# Altium PCB Copy of PCB1-DESKTOP-Q.PcbDoc
Units mil, origin at the board's own origin, x right, y up, seen from the top; angles counter-clockwise.
Board outline 6245 x 2920 mil, 2 copper layers (Top Layer, Bottom Layer); 32 components, 27 nets, 175 pads, 2 vias.
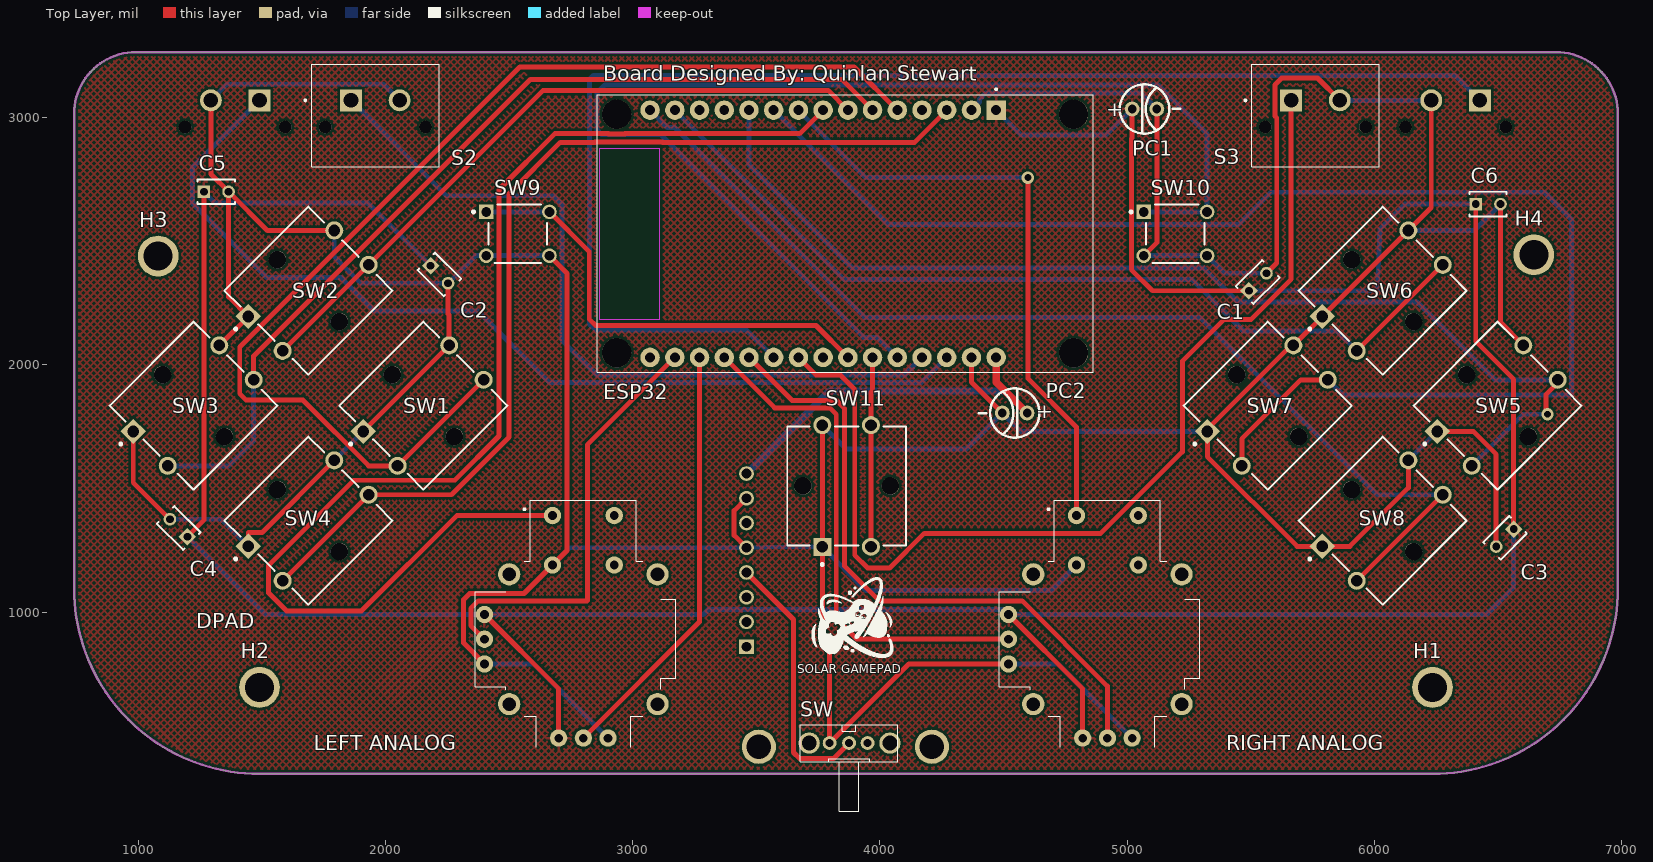
[diagram p0: Top Layer view]
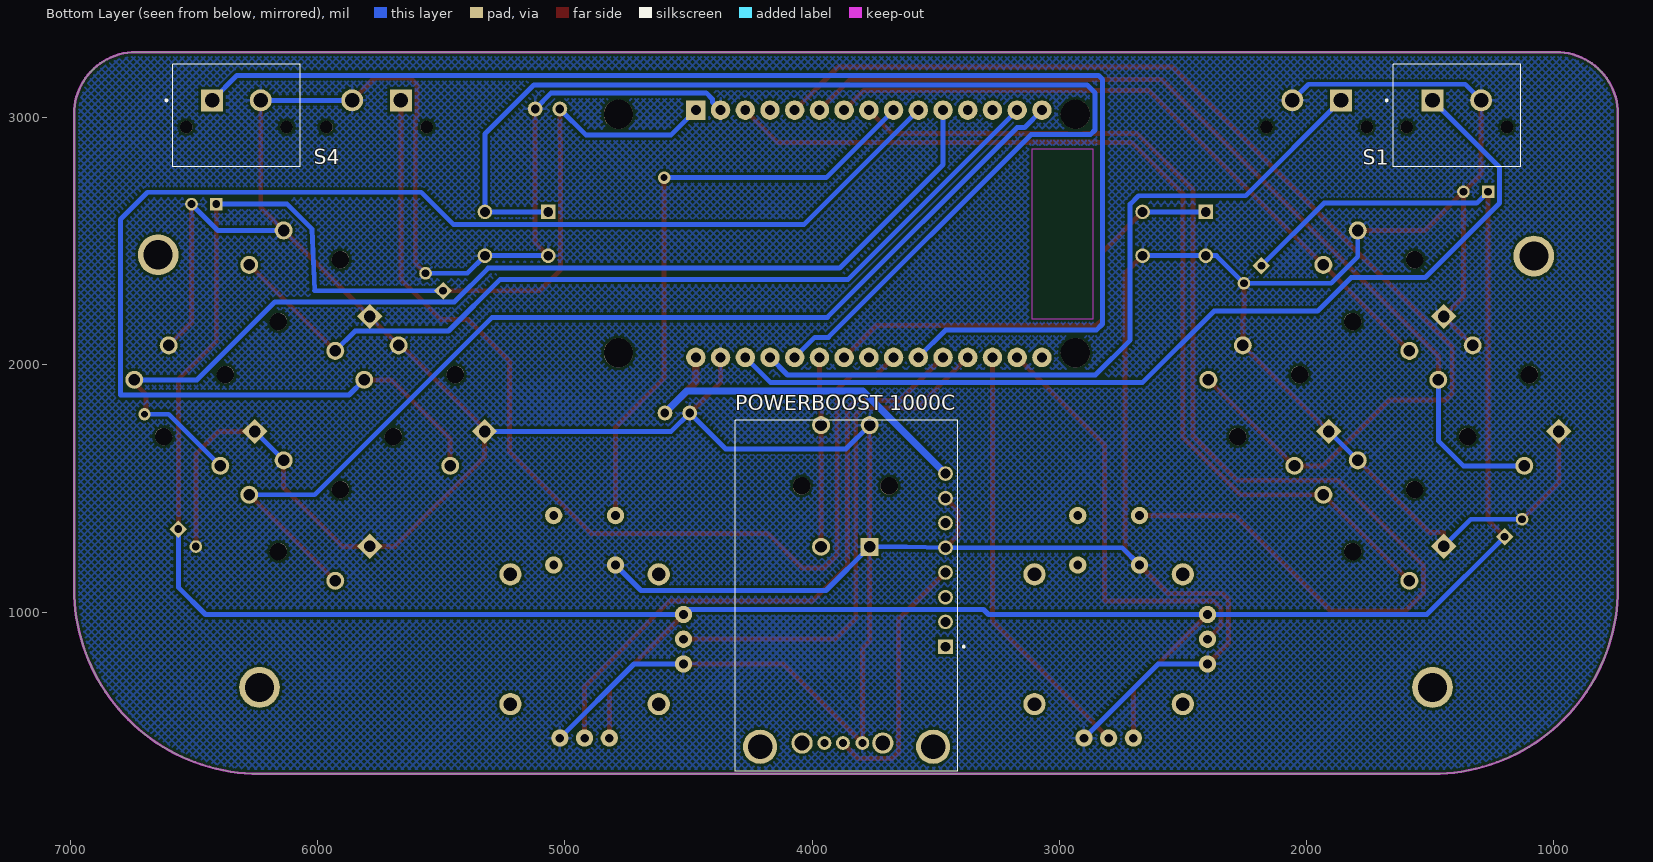
[diagram p1: Bottom Layer view, seen from below]

## Layer stack, top to bottom
Top Solder: solder mask 0.4, Solder Resist, Dk 3.5
Top Layer: signal copper 1.4
Dielectric 1: dielectric 12.6, FR-4, Dk 4.8
Bottom Layer: signal copper 1.4
Bottom Solder: solder mask 0.4, Solder Resist, Dk 3.5

## Board outline
740,1095 740,3015 cw(c990,3015) 990,3265 6735,3265 cw(c6735,3015) 6985,3015 6985,1095 cw(c6235,1095) 6235,345 1490,345 cw(c1490,1095)

## Design rules (kind name [scope] priority, off if disabled: settings)
Clearance [All] p1: gap=10 ignorepadtopadclearanceinfootprint=FALSE except(0: Arc-Hole Track-Hole SMDPad-Hole THPad-Hole Via-Hole Fill-Hole Poly-Hole Region-Hole Text-Hole)
PolygonConnect [All] p1: connectstyle=Relief reliefconductorwidth=10 reliefentries=4 polygonreliefangle="90 Angle" airgapwidth=10
RoutingVias [All] p1: holewidth=28 width=50 viastyle="Through Hole" minholewidth=28 minwidth=50 maxholewidth=28 maxwidth=50
SolderMaskExpansion [All] p1: expansion=4 istentingtop=FALSE
Width "Schematic Width Constraint_1" [InNet('5V')] p1: maxlimit=30 minlimit=30 preferedwidth=30 minimp=50.000000 maximp=50.000000 favimp=50.000000
Width [All] p2: maxlimit=20 minlimit=20 preferedwidth=20 minimp=50.000000 maximp=50.000000 favimp=50.000000
30 further rules are at their usual default settings.

## Components (designator, comment, footprint, x,y, rotation, side; value= is the part's Value field where it differs from the comment)
C1 "1uF" KEMT-C315-THT-2 5527.96,2335 r45 top
C2 "1uF" KEMT-C315-THT-2 2217.61,2365.36 r315 top
C3 "1uF" KEMT-C315-THT-2 6527.96,1300 r225 top
C4 "1uF" KEMT-C315-THT-2 1162.96,1340 r135 top
C5 "1uF" KEMT-C315-THT-2 1315,2700 r0 top
C6 "1uF" KEMT-C315-THT-2 6460,2650 r0 top
ESP32 "ESP32-DEVKIT-V1" MODULE_ESP32_DEVKIT_V1_NOKEEPOUT 3859.17,2530 r270 top
H1 "Hole 3mm" "Hole 3mm" 6235,695 r0 top
H2 "Hole 3mm" "Hole 3mm" 1490,695 r0 top
H3 "Hole 3mm" "Hole 3mm" 1080,2440 r0 top
H4 "Hole 3mm" "Hole 3mm" 6645,2445 r0 top
"LEFT ANALOG" "COM-09032" XDCR_COM-09032 2800,890 r0 top locked (schematic designator U1)
PC1 "> 40uF" "P Cap - Small" 5020,3035 r0 top
PC2 "> 40uF" "P Cap - Small" 4595,1805 r180 top
"POWERBOOST 1000C" "2465" MODULE_2465 3860,1065 r90 bottom locked
"RIGHT ANALOG" "COM-09032" XDCR_COM-09032 4920,890 r0 top locked (schematic designator U2)
S1 "TL1100CF(LT)" SW_TL1100CF160Q 1391.57,3070 r270 bottom locked
S2 "TL1100CF (LB)" SW_TL1100CF160Q 1958.43,3070 r270 top locked
S3 "TL1100CF(RB)" SW_TL1100CF160Q 5761.57,3070 r270 top locked
S4 "TL1100CF(RT)" SW_TL1100CF160Q 6328.43,3070 r270 bottom locked
SW "OS102011MA1Q" OS102011MA1Q 3875,470 r0 top
SW1 "B3F-4000" FP-B3F-4000-MFG 2152.96,1835 r45 top
SW2 "B3F-4000" FP-B3F-4000-MFG 1687.96,2300 r45 top locked
SW3 "B3F-4000" FP-B3F-4000-MFG 1222.96,1835 r45 top locked
SW4 "B3F-4000" FP-B3F-4000-MFG 1687.96,1370 r45 top locked
SW5 "B3F-4000" FP-B3F-4000-MFG 6497.96,1835 r45 top locked
SW6 "B3F-4000" FP-B3F-4000-MFG 6032.96,2300 r45 top locked
SW7 "B3F-4000" FP-B3F-4000-MFG 5567.96,1835 r45 top locked
SW8 "B3F-4000" FP-B3F-4000-MFG 6032.96,1370 r45 top locked
SW9 "B3F-1000" OMRON-B3F-1000-4_V 2535,2530 r0 top locked
SW10 "B3F-1000" OMRON-B3F-1000-4_V 5195,2530 r0 top locked
SW11 "B3F-4000" FP-B3F-4000-MFG 3865,1510 r90 top locked

## Footprints (in the part's own frame and the unit in brackets; to place one, negate y for a bottom-side part, rotate by r counter-clockwise, add the part's x,y. Pads: shape width x height; smd on the part's side, far side on the other; paste and mask are expansions set on the pad)
FP-B3F-4000-MFG [mm]
  rect 1.85x1.85 hole 1.2 paste-1000 mask+0: 1(-6.25,2.5)
  round 1.85 hole 1.2 paste-1000 mask+0: 2(6.25,2.5) 3(-6.25,-2.5) 4(6.25,-2.5)
  round 1.8 hole 1.8 unplated paste-1000 mask+0: ""(0,4.5) ""(0,-4.5)
  silkscreen extent -8.2,-6.1 6.1,6.1, body extent -7.27,-6.2 7.27,6.2, height 0.25
"Hole 3mm" [mil]
  round 165 hole 118.11: 1(0,0)
KEMT-C315-THT-2 [mm] "THD, 2-Leads, Body 3.81x2.54mm"
  rect 1.3x1.3 hole 0.8: 1(-1.27,0)
  round 1.3 hole 0.8: 2(1.27,0)
  silkscreen extent -1.91,-1.27 1.91,1.27, body extent -1.9,-1.27 1.9,1.27, height 4.66
MODULE_2465 [mil]
  rect 59.37x59.37 / inner round 59.37 / far side rect 59.37x59.37 hole 39.37: 1(-205,-400)
  round 59.37 hole 39.37: 2(-105,-400) 3(-5,-400) 4(95,-400) 5(195,-400) 6(295,-400) 7(395,-400) 8(495,-400)
  round 138.43 hole 98.43: P1(-610,-350) P2(-610,350)
  silkscreen extent -710,-478 710,450
MODULE_ESP32_DEVKIT_V1_NOKEEPOUT [mm]
  rect 2x2 / inner round 2 / far side rect 2x2 hole 1.02: 1(-12.7,15.515)
  round 2 hole 1.02: 2(-12.7,12.975) 3(-12.7,10.435) 4(-12.7,7.895) 5(-12.7,5.355) 6(-12.7,2.815) 7(-12.7,0.275) 8(-12.7,-2.265) 9(-12.7,-4.805) 10(-12.7,-7.345) 11(-12.7,-9.885) 12(-12.7,-12.425) 13(-12.7,-14.965) 14(-12.7,-17.505) 15(-12.7,-20.045) 16(12.7,-20.045) 17(12.7,-17.505) 18(12.7,-14.965) 19(12.7,-12.425) 20(12.7,-9.885) 21(12.7,-7.345) 22(12.7,-4.805) 23(12.7,-2.265) 24(12.7,0.275) 25(12.7,2.815) 26(12.7,5.355) 27(12.7,7.895) 28(12.7,10.435) 29(12.7,12.975) 30(12.7,15.515)
  round 3 hole 3 unplated: ""(-12.28,23.475) ""(-12.28,-23.475) ""(12.23,23.475) ""(12.23,-23.475)
  silkscreen extent -14.95,-25.48 14.23,25.48
OMRON-B3F-1000-4_V [mm] "TH, 4-Leads, Body 6x6mm"
  rect 1.5x1.5 hole 1 paste+0: 1(-3.25,2.25)
  round 1.5 hole 1 paste+0: 2(3.25,2.25) 4(3.25,-2.25)
  round 1.5 hole 1 paste+0 mask+0.102: 3(-3.25,-2.25)
  silkscreen extent -4.67,-3 3,3, body extent -3,-3 3,3, height 4.5
OS102011MA1Q [mil]
  round 56 hole 31.5: 1(-78.74,0) 2(0,0) 3(74.8,0)
  round 86 hole 59.06: MT1(-161.42,0) MT2(165.35,0)
  silkscreen extent -197,-276 197,75
"P Cap - Small" [mil]
  round 60 hole 35: 1(0,0) 2(100,0)
  silkscreen extent -50,-100 195,100
SW_TL1100CF160Q [mm]
  rect 2.25x2.25 / inner round 2.25 / far side rect 2.25x2.25 hole 1.5: 1(0,-2.5)
  round 2.25 hole 1.5: 2(0,2.5)
  round 1.3 hole 1.3 unplated: ""(2.75,-5.15) ""(2.75,5.15)
  silkscreen extent -3.68,-7.3 6.85,6.55, body extent -6.45,-6.55 6.85,6.55, height 14.7
XDCR_COM-09032 [mil]
  round 70 hole 35.43: B1A(-125,500) B1B(125,500) B2A(-125,300) B2B(125,300)
  round 70 hole 35: H1(-100,-400) H2(0,-400) H3(100,-400) V1(-400,100) V2(-400,0) V3(-400,-100)
  round 90 hole 55: S1(-300,262.5) S2(-300,-262.5) S3(300,-262.5) S4(300,262.5)
  silkscreen extent -437,-437 374,563

## Part data
C1 C2 C3 C4 C5 C6: library part CMP-1664-00009-1, "Capacitor, Ceramic, 10 pF, +/-5 %, 200 V, 2-Pin THD, RoHS, Bulk", Case\Package=DIP, Max Dual Supply Voltage="16 V", Max Operating Temperature="70 degC", Min Dual Supply Voltage="1.5 V", Min Operating Temperature="0 degC", Nominal Supply Current="1.2 mA", Nominal Supply Voltage="5 V", Nominal Voltage Gain="100 dB", Output Current="30 mA", Package Quantity=50, Bandwidth="700 KHz", Channels=2, Common Mode Rejection Ratio="65 dB", ComponentLink1Description="Manufacturer URL", ComponentLink1URL=http://www.kemet.com/, ComponentLink2Description=Datasheet, ComponentLink2URL=http://capacitoredge.kemet.com/capedge2/DataSheet/Datasheet-C315C100J2G5TA.pdf?pn=C315C100J2G5TA{BULK}, DatasheetVersion=Aug-16, Max Supply Voltage="16 V", Min Supply Voltage="1.5 V", Mount="Through Hole", Nominal Gain Bandwith Product="700 KHz", PackageDescription="2-Pin Through Hole Device, Body 3.81 x 2.54 mm", PackageReference=C315-THT-2, Packaging=Rail/Tube, Pins=8, Radiation Hardening=No, REACH SVHC="No SVHC", RoHSCompliant=true, Slew Rate="0.3 V\us", Unity Gain Bandwidth Product="700 KHz"
ESP32: "Dual core, Wi-Fi: 2.4 GHz up to 150 Mbits/s,BLE (Bluetooth Low Energy) and legacy Bluetooth, 32 bits, Up to 240 MHz", Package=None, Availability="Not in stock", Check_prices=https://www.snapeda.com/parts/ESP32-DEVKIT-V1/Do+it/view-part/?ref=eda, MF="Do it", MP=ESP32-DEVKIT-V1, Price=None, SnapEDA_Link=https://www.snapeda.com/parts/ESP32-DEVKIT-V1/Do+it/view-part/?ref=snap
"LEFT ANALOG" "RIGHT ANALOG": "Thumb Joystick", Package=None, Availability=Unavailable, MP=COM-09032, Price=None
PC1 PC2: library part "P Cap"
"POWERBOOST 1000C": "PowerBoost 1000 Charger - Rechargeable 5V Lipo USB Boost at 1A - 1000C", Package=None, Availability="In Stock", Check_prices=https://www.snapeda.com/parts/2465/Adafruit+Industries+LLC/view-part/?ref=eda, MF="Adafruit Industries", MP=2465, Price=None, SnapEDA_Link=https://www.snapeda.com/parts/2465/Adafruit+Industries+LLC/view-part/?ref=snap
S1 S2 S3 S4: library part TL1100CF160Q, "Tactile Switch SPST-NO Side Actuated Through Hole, Right Angle", Package=None, Availability="In Stock", Check_prices=https://www.snapeda.com/parts/TL1100CF160Q/E-Switch/view-part/?ref=eda, MF=E-Switch, MP=TL1100CF160Q, Price=None, Purchase-URL=https://pricing.snapeda.com/search/part/TL1100CF160Q/?ref=eda, SnapEDA_Link=https://www.snapeda.com/parts/TL1100CF160Q/E-Switch/view-part/?ref=snap
SW: "Slide Switch SPDT Through Hole, Right Angle", Package=None, Availability=Unavailable, MF=C&K, MP=OS102011MA1Q, Price=None, SnapEDA_Link=https://www.snapeda.com/parts/OS102011MA1Q/C%26K/view-part/13913/?ref=snap
SW1 SW2 SW3 SW4 SW5 SW6 SW7 SW8 SW11: library part CMP-08834-000001-1, "SWITCH TACTILE SPST-NO 0.05A 24V", Ambient Temperature Range High=+70°C, Ambient Temperature Range Low=-25°C, Contact Current Rating=50mA, Contact Resistance=100mΩ, Manufacturer=Omron, Operating Force=1.27N, Temperature="-25°C to +70°C", Voltage Rating Dc=24V, Automotive=No, Category=Switch, ComponentLink2Description=Datasheet, ComponentLink2URL=https://omronfs.omron.com/en_US/ecb/products/pdf/en-b3f.pdf, Device Class L1=Electromechanical, Device Class L2=Switches, Device Class L3="Tactile Switches", Digikey Description="SWITCH TACTILE SPST-NO 0.05A 24V", Electromechanical Life=3000000Cycles, Height=4.5mm, Lead Free=Yes, Manufacturer Part Number=B3F-4000, Mount="Through Hole", Mouser Description="Tactile Switches 12x12mm Std Ht 4.3 Gen Purpose 130g", Octopart=https://octopart.com/b3f-4000-omron-22510, Package=B3F-4000, RoHS=TRUE, Temperature Range High=+70°C, Temperature Range Low=-25°C, Throw Configuration=SPST-NO
SW9 SW10: library part CMP-1677-00002-1, "Tactile Switch, SPST-NO, 0.05 A, 5 to 24 V, -25 to 70 degC, 4-Pin THD, RoHS, Bulk", Capacitance="-45 f", Current Rating="1.5 A", Max Operating Temperature="70 degC", Min Operating Temperature="-40 degC", Package Quantity=1080, Voltage Rating="150 V", ComponentLink1Description="Manufacturer URL", ComponentLink1URL=http://www.omron.com/, ComponentLink2Description=Datasheet, ComponentLink2URL=http://www.omron.com/ecb/products/pdf/en-b3f.pdf, Contact Material=Brass, Contact Plating=Gold, DatasheetVersion=Jan-15, Gender=Female, Height="14.99 mm", Lead Pitch="1.27 mm", Length="18.34 mm", Mount="Through Hole", PackageDescription="4-Pin Through Hole Device, Body 6 x 6 mm", PackageReference=B3F-1000, Packaging=Tray, Pins=8, Radiation Hardening=No, RoHSCompliant=true, Shielding=Shielded, Width="25.4 mm"

## Via types
v1: diameter 50, hole 28, Top Layer to Bottom Layer, 2 vias

## Nets (pads, with @x,y where several pads share a name; then routed paths per layer and width w, separated by ;. In a path a pad name is that pad's centre, name@x,y a point inside that pad or via, vN(x,y) a via of type N, cw(c..) or ccw(c..) an arc to the next point about the centre after c; other vN are vias at no path point)
3V: "LEFT ANALOG.H1" "LEFT ANALOG.V1" "RIGHT ANALOG.H1" "RIGHT ANALOG.V1" C1.1 C2.1 C3.1 C4.1 C5.1 C6.1 ESP32.1 PC1.1 | length 13878.9
  Top Layer w20: C4.1 1265,1371.33 C5.1 ; 2400,990 2700,690 2700,490 ; 4520,990 4820,690 4820,490 ; PC1.1 5020,2918 5017,2915 5017,2385 5102.36,2299.64 C1.1 ; C6.1 6410,2095 6563.32,1941.68 C3.1
  Bottom Layer w20: C4.1 1512.96,990 2400,990 3286,990 3306,1010 4500,1010 4520,990 6453.32,990 6563.32,1100 C3.1 ; C5.1 1311,2654 1928.96,2654 C2.1 ; ESP32.1 4570,2930 4915,2930 PC1.1 ; C1.1 6011.64,2299.64 6023,2550 6123,2650 C6.1
5V: "POWERBOOST 1000C.8" ESP32.30 PC2.1 | length 1587
  Top Layer w30: ESP32.30 4470,1930 PC2.1
  Bottom Layer w30: 3460,1560 3794,1894 4506,1894 PC2.1
GND: "LEFT ANALOG.B2A" "LEFT ANALOG.H3" "LEFT ANALOG.V3" "POWERBOOST 1000C.5" "POWERBOOST 1000C.7" "RIGHT ANALOG.B2A" "RIGHT ANALOG.H3" "RIGHT ANALOG.V3" C1.2 C2.2 C3.2 C4.2 C5.2 C6.2 ESP32.2 ESP32.29 PC1.2 PC2.2 S1.2 S2.2 S3.2 S4.2 SW1.1 SW1.2 SW2.1 SW2.2 SW3.1 SW3.2 SW4.1 SW4.2 SW5.1 SW5.2 SW6.1 SW6.2 SW7.1 SW7.2 SW8.1 SW8.2 SW9.3 SW9.4 SW10.3 SW10.4 SW11.1 SW11.2 SW.1 | length 23842.3
  Top Layer w20: SW3.1 979.37,1523.59 C4.2 ; S1.2 1293.15,2771.85 C5.2 ; SW3.2 1327.95,2078.59 1444.37,2195.01 SW2.1 1365,2274.98 C5.2 ; SW4.1 1444.37,1321.37 1500.14,1321.37 SW4.2 ; SW2.2 1521.41,2543.59 C5.2 ; SW1.1 SW1.2 2257.36,2202 2252.96,2206.4 C2.2 ; 2400,790 2315,875 2315,1050 2340,1075 2560,1075 2675,1190 2734,1249 2734,2370.37 SW9.4 ; 3460,1260 3410,1310 3410,1410 3460,1460 ; SW11.2 SW11.1 3766.57,881.69 3796.26,852 SW.1 4116.26,790 4520,790 ; ESP32.29 4370,1930 PC2.2 ; SW10.3 5120,2494.37 PC1.2 ; C1.2 5605,2412.04 5605,2999 5598,3006 5598,3133 5625,3160 5770,3160 S3.2 ; SW8.2 6137.36,1502.36 5900.61,1265.61 SW8.1 5687.39,1265.61 5324.37,1628.63 5324.37,1739.37 5663.59,2078.59 5672.95,2078.59 5789.37,2195.01 SW6.1 SW6.2 6230,2636.23 S4.2 ; SW5.1 6400,1730.6 6492.61,1638 C3.2 ; C6.2 6510,2170.95 SW5.2
  Bottom Layer w20: C4.2 1334.62,1375.36 SW4.1 ; S1.2 1358.15,3135 1991.85,3135 S2.2 ; SW4.2 1792.36,1613.95 1909.01,1730.6 SW1.1 ; SW2.2 1792.36,2437.64 1900,2330 C2.2 2364.38,2441.42 SW9.3 SW9.4 ; 2400,790 2600,790 2900,490 ; 2675,1190 2745,1260 3460,1260 3616.94,1263.94 SW11.1 3943.51,1087 4692,1087 4795,1190 ; SW11.2 3862.99,1659.65 4349.65,1659.65 PC2.2 4569.4,1730.6 SW7.1 ; ESP32.2 4403,3063 4403,3075 4428,3100 5055,3100 PC1.2 ; 4520,790 4720,790 5020,490 ; SW10.3 SW10.4 5394.01,2370.36 C1.2 ; S3.2 S4.2 ; SW8.2 6137.36,1613.95 6254.01,1730.6 SW5.1 ; SW6.2 6403.59,2543.59 C6.2
NetESP32_3: ESP32.3 SW4.3 SW4.4 | length 4052.6
  Top Layer w20: SW4.3 SW4.4 2266.4,1474.4 2500,1708 2500,2693 2707,2900 2847.15,2900 2847.94,2900.79 3120.02,2900.79 3120.8,2900 4140,2900 ESP32.3
NetESP32_4: ESP32.4
NetESP32_5: ESP32.5 SW1.3 SW1.4 | length 4642.3
  Top Layer w20: SW1.4 SW1.3 1931.59,1591.41 1666,1857 1436,1857 1410,1883 1410,2072 2543,3205 3895,3205 ESP32.5
NetESP32_6: ESP32.6 SW3.3 SW3.4 | length 3751.8
  Top Layer w20: SW3.4 1466.55,2035.55 2586,3155 3845,3155 ESP32.6
  Bottom Layer w20: SW3.3 1365.41,1591.41 1466.55,1692.55 SW3.4
NetESP32_7: ESP32.7 SW2.3 SW2.4 | length 2756
  Top Layer w20: SW2.3 1878,2350.85 SW2.4 2637.15,3110 3790,3110 ESP32.7
NetESP32_8: "LEFT ANALOG.B1A" ESP32.8 | length 5040.2
  Top Layer w20: 2675,1390 2288,1390 1902,1004 1600,1004 1527,1077 1527,1189 1871,1533 2280,1533 2459,1712 2459,2709 2685,2935 2901.62,2935 2902.21,2934.41 2967.71,2934.41 2968.3,2935 3675,2935 ESP32.8
NetESP32_9: "RIGHT ANALOG.B1A" ESP32.9 | length 2489.7
  Top Layer w20: v1(4598,2757) 4598,1945 4795,1748 4795,1390
  Bottom Layer w20: ESP32.9 3943,2757 v1(4598,2757)
NetESP32_10: ESP32.10 SW7.3 SW7.4 | length 5797
  Top Layer w20: SW7.3 5463.57,1701 5701.96,1939.4 SW7.4
  Bottom Layer w20: ESP32.10 4032,2568 5451,2568 5581,2698 6688,2698 6798,2588 6798,1878 5872.95,1878 SW7.4
NetESP32_11: ESP32.11 SW5.3 SW5.4 | length 4405.8
  Top Layer w20: v1(6700,1800) 6695,1805 6695,1880.54 6741.55,1927.09 SW5.4
  Bottom Layer w20: ESP32.11 3470,2810 3889,2391 5310.05,2391 5447,2254.05 6172.95,2254.05 6487.6,1939.4 SW5.4 ; SW5.3 6602.16,1800 v1(6700,1800)
NetESP32_14: ESP32.14 SW6.3 SW6.4 | length 3654
  Top Layer w20: SW6.3 5998,2125.85 SW6.4
  Bottom Layer w20: ESP32.14 3854,2346 5261.48,2346 5470.48,2137 5847.98,2137 SW6.3
NetESP32_15: ESP32.15 SW8.3 SW8.4 | length 4343
  Top Layer w20: SW8.3 SW8.4
  Bottom Layer w20: ESP32.15 3140,2960 3170,2960 3937.88,2192.12 5293.88,2192.12 6011.6,1474.4 SW8.4
NetESP32_17: "LEFT ANALOG.V2" ESP32.17 | length 1761.7
  Top Layer w20: 2400,890 2345,945 2345,1015 2375,1045 2814,1045 2816,1047 2816,1676 ESP32.17
NetESP32_18: "LEFT ANALOG.H2" ESP32.18 | length 1734.7
  Top Layer w20: 2800,490 3270,960 ESP32.18
NetESP32_19: "RIGHT ANALOG.V2" ESP32.19 | length 2106.1
  Top Layer w20: ESP32.19 3574,1826 3797,1826 3823,1800 3823,974 3907,890 4520,890
NetESP32_20: "RIGHT ANALOG.H2" ESP32.20 | length 2584.3
  Top Layer w20: ESP32.20 3644,1856 3824,1856 3857,1823 3857,1185.63 3997.63,1045 4575,1045 4920,700 4920,490
NetESP32_21: ESP32.21 S4.1 | length 5441.2
  Bottom Layer w20: ESP32.21 3460,2140 2850,2140 2825,2165 2825,3155 2841,3171 6325.85,3171 S4.1
NetESP32_22: ESP32.22 S3.1 | length 4161.2
  Top Layer w20: ESP32.22 3742,1958 3840,1958 3898,1900 3898,1230 3950,1178 4039,1178 4179,1318 4893,1318 5223,1648 5223,2015 5391,2183 5500,2183 5663.15,2346.15 S3.1
NetESP32_23: ESP32.23
NetESP32_24: ESP32.24 SW9.1 SW9.2 | length 1866.4
  Top Layer w20: SW9.2 2824,2457.53 2824,2185 2850,2159 3741,2159 ESP32.24
  Bottom Layer w20: SW9.1 SW9.2
NetESP32_25: ESP32.25 SW11.3 SW11.4 | length 768.8
  Top Layer w20: SW11.3 SW11.4 3963.43,1889 3970,1895.57 ESP32.25
NetESP32_26: ESP32.26 SW10.1 SW10.2 | length 4880.6
  Bottom Layer w20: ESP32.26 3989,2111 3934,2111 3114,2931 2874,2931 2855,2950 2855,3100 2887,3132 5125,3132 5322.95,2934.05 SW10.2 SW10.1
NetESP32_27: ESP32.27 S2.1 | length 3121.8
  Bottom Layer w20: S2.1 2246,2684 2679,2684 2713,2650 2713,2100 2854,1959 4099,1959 ESP32.27
NetESP32_28: ESP32.28 S1.1 | length 3921.4
  Bottom Layer w20: S1.1 1219,2799 1219,2654 1520,2353 1819,2353 1955,2217 2374,2217 2662,1929 4169,1929 ESP32.28
"NetPOWERBOOST 1000C_4": "POWERBOOST 1000C.4" SW.2 | length 1068.2
  Top Layer w20: 3460,1160 3650,970 3650,432 3675,407 3812,407 SW.2
pads on no net: "LEFT ANALOG.B1B" "LEFT ANALOG.B2B" "LEFT ANALOG.S1" "LEFT ANALOG.S2" "LEFT ANALOG.S3" "LEFT ANALOG.S4" "POWERBOOST 1000C.1" "POWERBOOST 1000C.2" "POWERBOOST 1000C.3" "POWERBOOST 1000C.6" "POWERBOOST 1000C.P1" "POWERBOOST 1000C.P2" "RIGHT ANALOG.B1B" "RIGHT ANALOG.B2B" "RIGHT ANALOG.S1" "RIGHT ANALOG.S2" "RIGHT ANALOG.S3" "RIGHT ANALOG.S4" ESP32. ESP32.12 ESP32.13 ESP32.16 H1.1 H2.1 H3.1 H4.1 S1. S2. S3. S4. SW1. SW2. SW3. SW4. SW5. SW6. SW7. SW8. SW11. SW.3 SW.MT1 SW.MT2

## Polygon pours and split planes (outlines as drawn)
3V on Top Layer "3Vpour" (hatched 45Degree grid 20 track 8, pour order 0): 740,1095 740,3015 cw(c990,3015) 990,3265 6735,3265 cw(c6735,3015) 6985,3015 6985,1095 cw(c6235,1095) 6235,345 1490,345 cw(c1490,1095)
GND on Bottom Layer "GNDpour" (hatched 45Degree grid 20 track 8, pour order 1): 740,1095 740,3015 cw(c990,3015) 990,3265 6735,3265 cw(c6735,3015) 6985,3015 6985,1095 cw(c6235,1095) 6235,345 1490,345 cw(c1490,1095)

## Keep-outs
Keep-Out Layer:
  rectangle: 2865,2185 3110,2875
  lines w10: 740,1095 ccw(c1490,1095) 1490,345 6235,345 ccw(c6235,1095) 6985,1095 6985,3015 ccw(c6735,3015) 6735,3265 990,3265 ccw(c990,3015) 740,3015 740,1095

## Silkscreen, mask and mechanical layers (free items; w line width, h text height)
Top Overlay:
  drawing of 16 lines, arcs and shapes, not listed
  text "Board Designed By: Quinlan Stewart" at 2880,3149.99 h60
  text "DPAD" at 1235,935 h60
  text "SOLAR GAMEPAD" at 3665,740.62 h60

## Dimensions
5663.15,3070 to 2056.85,3070 on Mechanical 1
5860,3070 to 6230,3070 on Mechanical 1
1860,3070 to 1490,3070 on Mechanical 1
6426.85,3070 to 6735,3265 on Mechanical 1
990,3265 to 1293.15,3070 on Mechanical 1
740,3015 to 6985,3015 on Mechanical 1
883.33,1835 to 740,3015 on Mechanical 1
6837.6,1835 to 6985,3015 on Mechanical 1
2492.6,1835 to 5228.33,1835 on Mechanical 1
4795,1390 to 4783.39,2048.5 on Mechanical 1
2922.96,1390 to 2934.96,2048.5 on Mechanical 1
3100,1152.5 to 4620,1152.5 on Mechanical 1
5228.33,1835 to 5220,1152.5 on Mechanical 1
2492.6,1835 to 2500,1152.5 on Mechanical 1
2400,890 to 2492.6,1835 on Mechanical 1
5228.33,1835 to 4520,890 on Mechanical 1
2800,490 to 4920,490 on Mechanical 1
1222.96,2174.63 to 1348.33,2300 on Mechanical 1
1562.6,1835 to 1813.33,1835 on Mechanical 1
1687.96,1709.63 to 1687.96,1960.37 on Mechanical 1
1687.96,1960.37 to 1687.96,1709.63 on Mechanical 1
1562.6,1835 to 1813.33,1835 on Mechanical 1
2027.6,2300 to 2152.96,2174.63 on Mechanical 1
5567.96,2174.63 to 5693.33,2300 on Mechanical 1
6372.6,2300 to 6497.96,2174.63 on Mechanical 1
6032.96,1960.37 to 6032.96,1709.63 on Mechanical 1
5907.6,1835 to 6158.33,1835 on Mechanical 1
5907.6,1835 to 6158.33,1835 on Mechanical 1
6032.96,1709.63 to 6032.96,1960.37 on Mechanical 1

## Text inside footprints (layer, text, board x,y; h text height)
PC1: Top Overlay "+" at 4915,3005 h60
PC2: Top Overlay "+" at 4700,1835 h60 r180